# EAGLE board master2 (EAGLE 8.6.1)
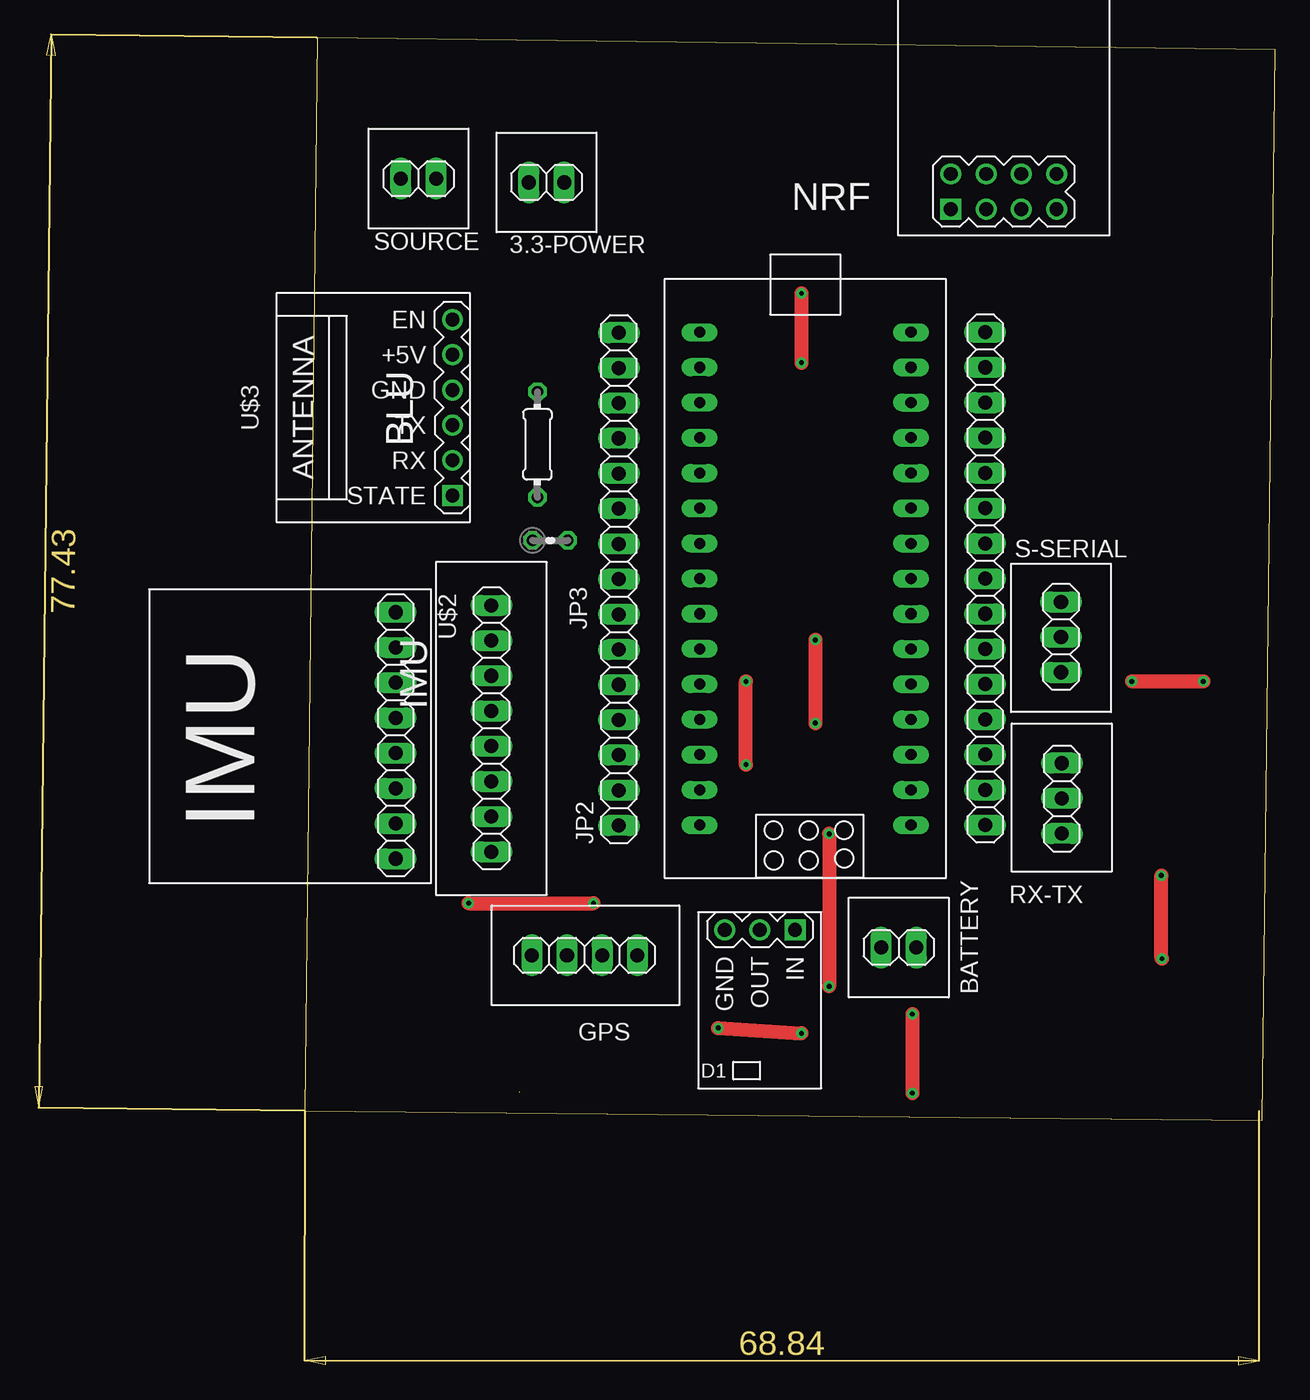
[diagram p0: board, top side]
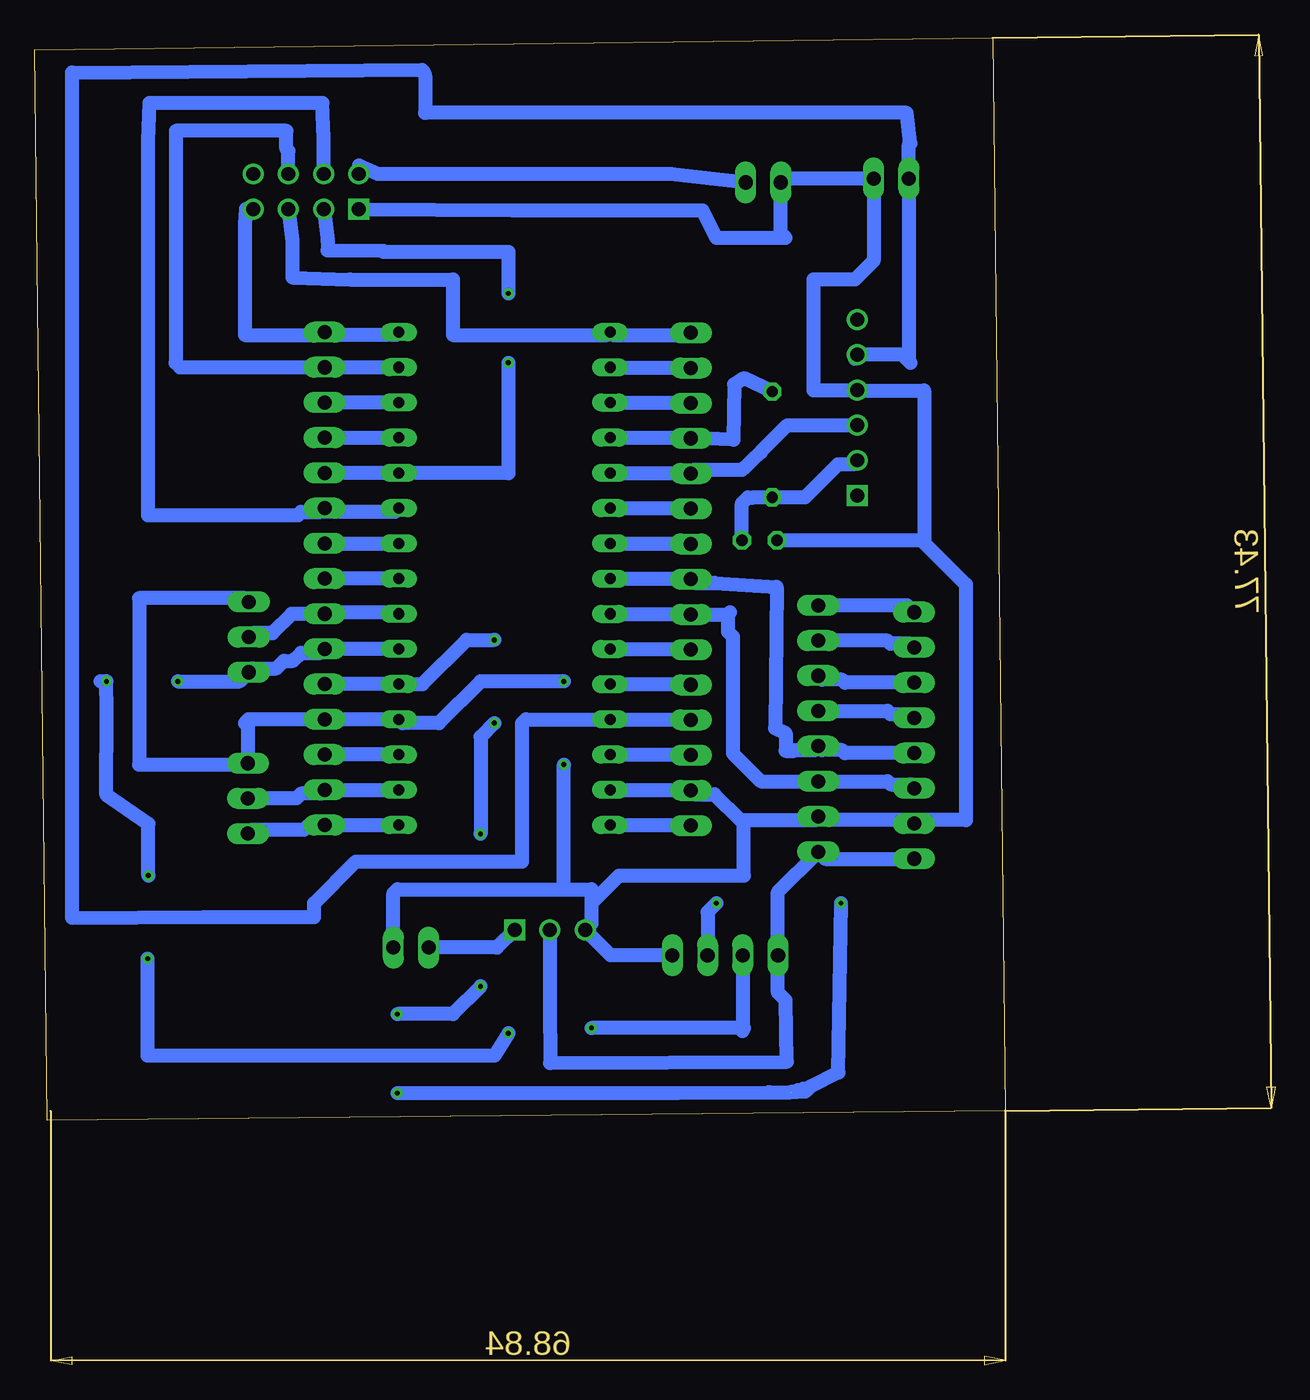
[diagram p1: board, bottom side, seen from below]

Size 70 x 78.11 mm. Coordinates in mm from the lower left corner, seen from the top.
Outline: 0,0.69 69.09,0 70,77.25 0.91,78.11 0,0.69
Copper layers (1*16): Top 0.035mm / dielectric 1.5mm / Bottom 0.035mm
Design rules "default *": minimum track width 1mm, minimum drill 0.35mm, track to track 1mm, track to pad 1mm, pad to pad 1mm, via to via 1mm, smd to smd 6mil, copper to edge 40mil, drill to drill 6mil, minimum pad ring 10mil, minimum via ring 8mil, stop-mask expansion 4mil, vias tented up to drill 0mil, thermal gap 10mil

## Footprints (pad centres in the part's own frame; a part is rotated, then mirrored left to right if it is on the bottom)
1X02_DATA = drill 1.016 long: 1 -1.27,0; 2 1.27,0
1X04_DATA = drill 1.016 long: 1 -3.81,0; 2 -1.27,0; 3 1.27,0; 4 3.81,0
1X15 = drill 1.016 long: 1 -17.78,0; 2 -15.24,0; 3 -12.7,0; 4 -10.16,0; 5 -7.62,0; 6 -5.08,0; 7 -2.54,0; 8 0,0; 9 2.54,0; 10 5.08,0; 11 7.62,0; 12 10.16,0; 13 12.7,0; 14 15.24,0; 15 17.78,0
1X08_DATA = drill 1.016 long: 1 -8.89,0; 2 -6.35,0; 3 -3.81,0; 4 -1.27,0; 5 1.27,0; 6 3.81,0; 7 6.35,0; 8 8.89,0
WIRELESS-NRF24L01-PA-EXT = drill 1 square: 1 -18.415,3.81 | drill 1: 2 -15.875,3.81; 3 -18.415,1.27; 4 -15.875,1.27; 5 -18.415,-1.27; 6 -15.875,-1.27; 7 -18.415,-3.81; 8 -15.875,-3.81
0204/7 = drill 0.813 octagon: 1 -3.81,0; 2 3.81,0
0204V = drill 0.813 octagon: 1 -1.27,0; 2 1.27,0
1X03_DATA = drill 1.016 long: 1 -2.54,0; 2 0,0; 3 2.54,0
NANO = drill 0.8 long: 3.3V -10.16,24.13; 5V -10.16,-1.27; A0 -10.16,19.05; A1 -10.16,16.51; A2 -10.16,13.97; A3 -10.16,11.43; A4 -10.16,8.89; A5 -10.16,6.35; A6 -10.16,3.81; A7 -10.16,1.27; AREF -10.16,21.59; D2 5.08,1.27; D3 5.08,3.81; D4 5.08,6.35; D5 5.08,8.89; D6 5.08,11.43; D7 5.08,13.97; D8 5.08,16.51; D9 5.08,19.05; D10 5.08,21.59; D11 5.08,24.13; D12 5.08,26.67; D13 -10.16,26.67; GND -10.16,-6.35; GND1 5.08,-1.27; RAW -10.16,-8.89; RST -10.16,-3.81; RST1 5.08,-3.81; RX1 5.08,-6.35; TX0 5.08,-8.89
IMU_GY521 = drill 1.016 long: ADO -6.35,0; GND 6.35,0; INT -8.89,0; SCL 3.81,0; SDA 1.27,0; VCC 8.89,0; XCL -3.81,0; XDA -1.27,0
WIRELESS-BLUETOOTH-HC-05 = drill 1 square: 1 -6.35,-17.145 | drill 1: 2 -3.81,-17.145; 3 -1.27,-17.145; 4 1.27,-17.145; 5 3.81,-17.145; 6 6.35,-17.145
REG-AMS1117-3P = drill 1 square: 1 -2.54,-5.08 | drill 1: 2 0,-5.08; 3 2.54,-5.08

## Placement (x,y rotation side)
3.3-POWER  [1X02_DATA]  17.45,67.67 0 top
BATTERY  [1X02_DATA]  42.86,12.47 0 top
GPS  [1X04_DATA]  20.2,11.91 180 top
JP1  [1X15]  49.09,39.09 270 top
JP2  [1X15]  22.67,39.05 90 top
JP3  [1X08_DATA]  13.48,28.27 270 top
M1  WIRELESS-NRF24L01-PA-EXT  [WIRELESS-NRF24L01-PA-EXT]  50.43,84.16 90 top
R1  1k  [0204/7]  16.8,48.77 90 top
R2  2.2k  [0204V]  17.72,41.85 0 top
RX-TX  [1X03_DATA]  54.62,23.23 90 top
S-SERIAL  [1X03_DATA]  54.56,34.87 270 top
SOURCE  [1X02_DATA]  8.22,67.95 0 top
U$1  ARDUINO_NANO  [NANO]  38.66,30.2 0 top
U$2  IMU_ROBOCON  [IMU_GY521]  6.57,27.77 270 top
U$3  BLUETOOTH-HC-05  [WIRELESS-BLUETOOTH-HC-05]  -6.47,51.43 90 top
U$4  REG-AMS1117-3P-3.3V  [REG-AMS1117-3P]  32.84,8.67 180 top

## Library data of the parts
3.3-POWER BATTERY GPS JP3 M1 R1 RX-TX S-SERIAL SOURCE U$1-U$4 = MIA_LIBRARY-2-2-2
JP1 JP2 = pinhead
R2 = MIA_LIBRARY-2-2-2; SPICEPREFIX: R

## Nets
3.3: GPS.4 JP3.8 U$2.VCC U$4.2
3.3-POWER: 3.3-POWER.2 M1.2
A0: JP2.12 R1.2 U$1.A0
A1: JP2.11 U$1.A1 U$3.3
D2: GPS.2 JP1.11 U$1.D2
D3: GPS.3 JP1.10 S-SERIAL.3 U$1.D3
D4: JP1.9 S-SERIAL.2 U$1.D4
D5: JP1.8 U$1.D5
D6: JP1.7 U$1.D6
D7: JP1.6 M1.4 U$1.D7
D8: JP1.5 M1.3 U$1.D8
GND: 3.3-POWER.1 BATTERY.2 GPS.1 JP1.12 JP2.2 JP3.7 M1.1 R2.1 RX-TX.3 S-SERIAL.1 SOURCE.2 U$1.GND U$1.GND1 U$2.GND U$3.4 U$4.3
MISO: JP1.1 M1.7 U$1.D12
MOSI: JP1.2 M1.6 U$1.D11
N$1: JP2.1 U$1.RAW
N$2: R1.1 R2.2 U$3.2
N$3: JP2.3 U$1.RST
N$4: JP1.3 U$1.D10
N$5: JP2.5 U$1.A7
N$6: JP2.6 U$1.A6
N$7: JP1.14 RX-TX.2 U$1.RX1
N$8: JP3.1 U$2.INT
N$9: JP2.9 U$1.A3
N$10: JP2.10 U$1.A2
N$11: JP3.2 U$2.ADO
N$12: JP3.3 U$2.XCL
N$13: JP2.13 U$1.AREF
N$14: JP2.14 U$1.3.3V
N$15: JP3.4 U$2.XDA
N$19: JP1.4 U$1.D9
N$28: JP1.13 U$1.RST1
N$30: JP1.15 RX-TX.1 U$1.TX0
N-5V: BATTERY.1 U$4.1
S-CLC: JP2.15 M1.5 U$1.D13
SCL: JP2.7 JP3.6 U$1.A5 U$2.SCL
SDA: JP2.8 JP3.5 U$1.A4 U$2.SDA
VCC: JP2.4 SOURCE.1 U$1.5V U$3.5

## Tracks (layer width: path | path; a pad name or v marks a point on that pad's centre or on a via)
3.3
  Bottom 1: U$4.2 32.84,8.36 32.83,4.13 15.75,4.23 15.84,8.67 16.39,9.22 GPS.4 16.39,16.47 JP3.8 12.98,18.88 U$2.VCC
3.3-POWER
  Bottom 1: 3.3-POWER.2 24.11,68.28 45.23,68.28 46.62,68.89 M1.2
A0
  Bottom 1: U$1.A0 28.46,49.21 JP2.12 19.6,49.11 19.55,53.09 18.84,53.54 R1.2
A1
  Bottom 1: U$1.A1 22.71,46.71 JP2.11 22.39,46.95 18.97,46.95 18.84,47.08 18.8,47.08 18.22,47.66 17.63,48.22 17.63,48.24 | U$3.3 15.71,50.16 17.63,48.24 | 17.63,48.24
D2  (via drill 0.35)  (1 unrouted)
  Top 1: v36.84,34.67 v36.84,28.67 | v37.84,20.67 v37.84,9.67 | v43.84,7.67 v43.84,1.97 | v11.84,15.67 v20.84,15.67
  Bottom 1: JP1.11 U$1.D2 42.04,31.47 38.84,34.67 v36.84,34.67 | v36.84,28.67 37.84,27.67 v37.84,20.67 | v37.84,9.67 39.84,7.67 v43.84,7.67 | 14.03,2.46 12.04,3.46 v11.84,15.67 | v20.84,15.67 21.47,15.04 GPS.2 | v43.84,1.97 23.64,1.97 17.05,2.04 15.47,2.04 | 14.53,2.27 14.95,2.18 15.08,2.05 15.47,2.05 14.42,2.06 14.03,2.46 | 14.55,2.29 14.03,2.46
D3  (via drill 0.35)
  Top 1: v29.84,6.67 v35.84,6.28 | v61.85,11.67 61.8,11.71 v61.8,17.67 | v64.82,31.67 v59.67,31.67
  Bottom 1: U$1.D3 JP1.10 49.37,33.73 50.79,33.73 51.37,33.15 52.03,33.15 52.57,32.61 54.28,32.61 S-SERIAL.3 55.22,31.67 v59.67,31.67 | GPS.3 18.93,6.45 18.84,6.66 v29.84,6.67 | v35.84,6.28 36.84,4.67 61.85,4.67 v61.85,11.67 | v61.8,17.67 61.8,21.39 64.82,23.49 64.81,29.56 v64.82,31.67 65.25,31.67
D4
  Bottom 1: S-SERIAL.2 54.28,35.15 52.86,35.15 51.46,36.55 JP1.9 48.97,36.67 43.84,36.67 43.84,36.65 U$1.D4
D5
  Bottom 1: U$1.D5 JP1.8
D6
  Bottom 1: JP1.7 U$1.D6
D7
  Bottom 1: M1.4 49.16,70.86 49.24,73.4 61.73,73.4 61.84,70.67 61.84,43.67 51.01,43.67 50.79,43.89 49.37,43.89 | 49.37,43.89 JP1.6 | U$1.D7 44.02,43.89 49.37,43.89
D8  (via drill 0.35)
  Top 1: v35.84,59.67 v35.84,54.67
  Bottom 1: M1.3 48.87,63.46 48.87,62.77 44.84,62.74 44.84,62.67 35.84,62.67 v35.84,59.67 | v35.84,54.67 35.84,46.67 35.88,46.71 U$1.D8 JP1.5
GND  (via drill 0.35)
  Top 1: v31.84,25.67 v31.84,31.67
  Bottom 1: 5.84,41.67 5.84,52.67 10.65,52.67 U$3.4 13.81,52.7 13.84,52.67 13.84,60.67 10.84,60.67 9.49,62.02 SOURCE.2 15.9,67.95 3.3-POWER.1 16.18,64.01 15.84,63.67 20.84,63.67 21.84,65.67 35.55,65.67 M1.1 | 5.84,41.67 6.02,41.85 R2.1 | S-SERIAL.1 54.82,37.67 62.47,37.67 62.47,25.67 54.72,25.67 RX-TX.3 54.62,28.45 54.84,28.67 54.58,28.93 JP1.12 U$1.GND1 43.48,28.67 40.84,28.67 37.84,31.67 v31.84,31.67 | BATTERY.2 44.13,16.38 43.84,16.67 31.84,16.67 | 31.84,16.67 29.84,16.67 29.84,15.67 | 29.84,15.67 29.84,14.21 U$4.3 28.46,11.91 GPS.1 | 13.73,21.67 JP3.7 | 18.84,21.67 19.11,21.67 20.97,23.53 22.39,23.53 JP2.2 28.46,23.81 U$1.GND | 18.84,21.67 13.73,21.67 | 5.84,41.67 2.84,38.67 2.84,21.67 6.32,21.67 U$2.GND 6.82,21.67 13.73,21.67 | 29.84,15.67 27.84,17.67 18.84,17.67 18.84,21.67 | 31.84,16.67 v31.84,25.67
MISO
  Bottom 1: M1.7 54.77,65.75 54.84,64.67 54.84,56.67 49.29,56.67 | 49.29,56.67 JP1.1 | U$1.D12 43.94,56.67 49.29,56.67
MOSI
  Bottom 1: M1.6 51.7,69.95 51.84,70.09 51.84,71.4 59.81,71.4 59.81,54.7 59.84,54.67 59.5,54.33 JP1.2 U$1.D11
N$1
  Bottom 1: U$1.RAW 22.71,21.31 JP2.1
N$2
  Bottom 1: R2.2 18.99,44.52 18.56,44.95 18.14,44.95 18.13,44.96 R1.1 14.42,44.96 12.05,47.33 10.96,47.33 U$3.2
N$3
  Bottom 1: U$1.RST 22.71,26.39 JP2.3
N$4
  Bottom 1: U$1.D10 JP1.3
N$5
  Bottom 1: U$1.A7 22.71,31.47 JP2.5
N$6
  Bottom 1: JP2.6 28.46,33.97 U$1.A6
N$7
  Bottom 1: U$1.RX1 JP1.14 49.37,23.57 50.79,23.57 51.13,23.23 RX-TX.2
N$8
  Bottom 1: U$2.INT 7.07,37.16 JP3.1
N$9
  Bottom 1: JP2.9 28.46,41.59 U$1.A3
N$10
  Bottom 1: U$1.A2 22.71,44.17 JP2.10
N$11
  Bottom 1: U$2.ADO 6.85,34.4 8.27,34.4 8.49,34.62 JP3.2
N$12
  Bottom 1: U$2.XCL 11.56,31.58 11.78,31.8 13.2,31.8 JP3.3
N$13
  Bottom 1: U$1.AREF 22.71,51.79 JP2.13
N$14
  Bottom 1: JP2.14 28.46,54.29 U$1.3.3V
N$15
  Bottom 1: JP3.4 8.49,29.54 8.27,29.32 6.85,29.32 U$2.XDA
N$19
  Bottom 1: JP1.4 U$1.D9
N$28
  Bottom 1: U$1.RST1 JP1.13
N$30
  Bottom 1: RX-TX.1 54.34,20.97 50.56,20.97 50.22,21.31 JP1.15 U$1.TX0
N-5V
  Bottom 1: U$4.1 36.66,12.47 BATTERY.1
S-CLC
  Bottom 1: JP2.15 22.83,56.67 28.3,56.67 U$1.D13 28.7,56.67 39.84,56.67 39.84,60.67 47.27,60.67 51.41,60.81 51.41,63.46 M1.5
SCL
  Bottom 1: U$1.A5 22.71,36.55 JP2.7 20,36.51 | 20,36.51 19.84,36.67 | 20,36.51 20,35.26 19.65,34.91 19.65,26.48 17.63,24.46 JP3.6 8.49,24.46 8.27,24.24 6.85,24.24 U$2.SCL
SDA
  Bottom 1: U$1.A4 22.71,39.09 JP2.8 22.39,38.77 20.97,38.77 16.49,38.5 16.59,28.3 15.84,27.94 15.84,26.67 15.23,26.67 15.18,26.72 13.76,26.72 JP3.5 13.2,26.72 11.78,26.72 11.56,26.5 U$2.SDA
VCC
  Bottom 1: 6.95,54.78 SOURCE.1 6.95,70.4 6.85,70.5 6.84,70.5 7.11,72.69 41.82,72.69 41.84,72.67 41.84,75.37 42.06,75.79 67.3,75.59 67.31,14.62 57.84,14.67 49.84,14.67 49.84,15.67 46.84,18.67 34.84,18.67 34.84,28.67 34.58,28.93 U$1.5V 22.71,28.93 JP2.4 | 6.95,54.78 6.84,54.67 | 6.95,54.78 7.41,55.24 U$3.5 10.84,55.08 10.84,54.95

## Text on the board
tNames: NRF | BLU | IMU